# Altium PCB Ad - ESP-12F.PcbDoc
Units mm, origin at the board's own origin, x right, y up, seen from the top; angles counter-clockwise.
Board outline 102 x 50 mm, 2 copper layers (Top Layer, Bottom Layer); 76 components, 58 nets, 277 pads, 56 vias.
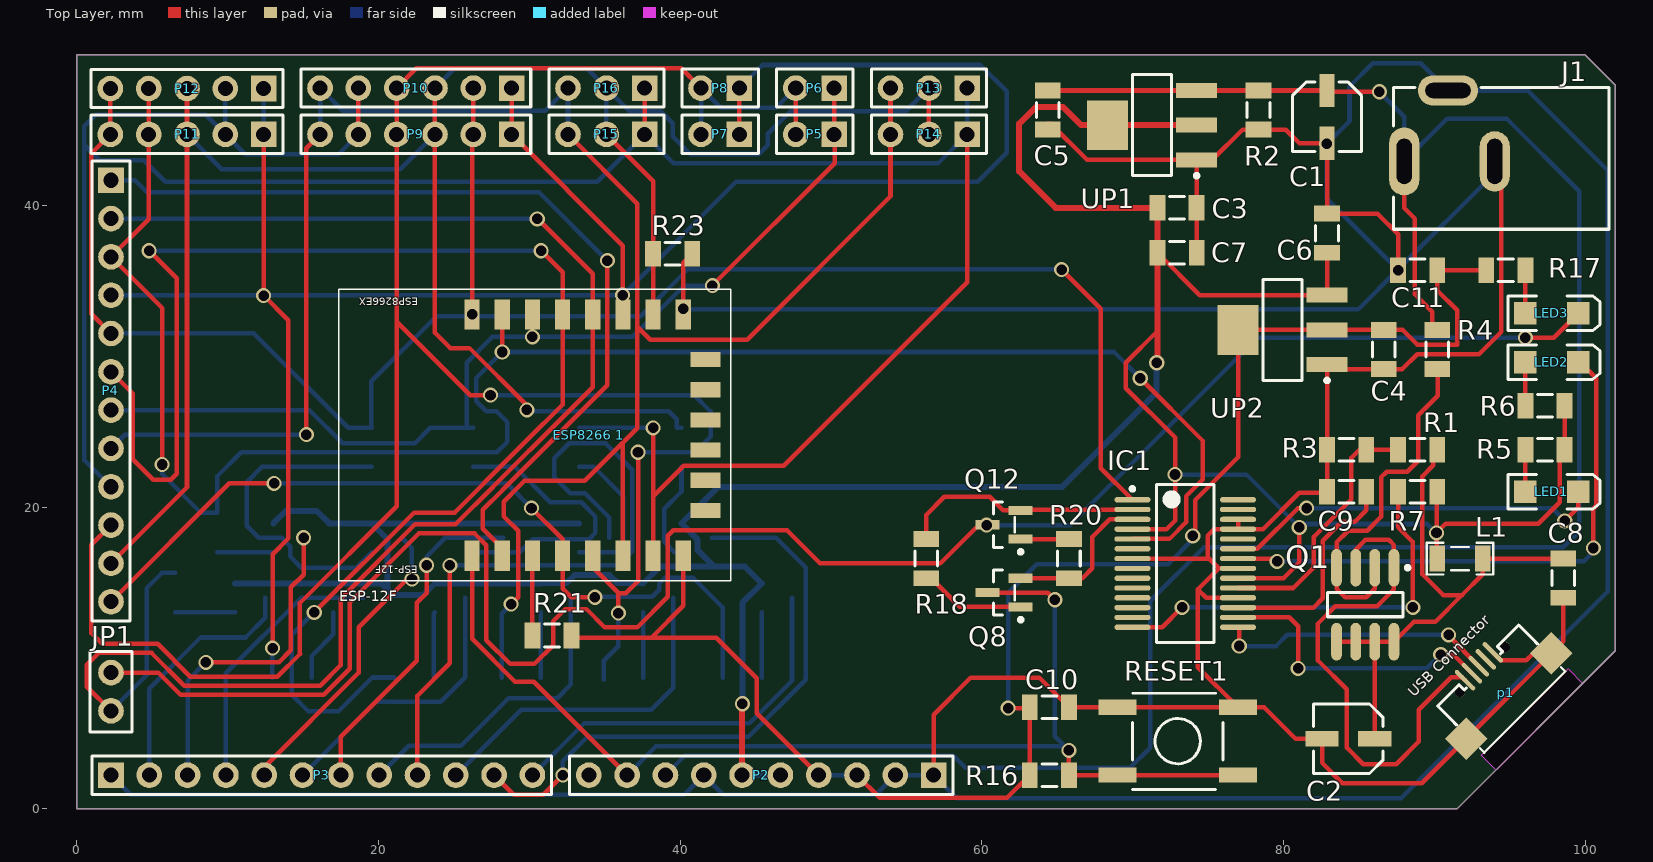
[diagram p0: Top Layer view]
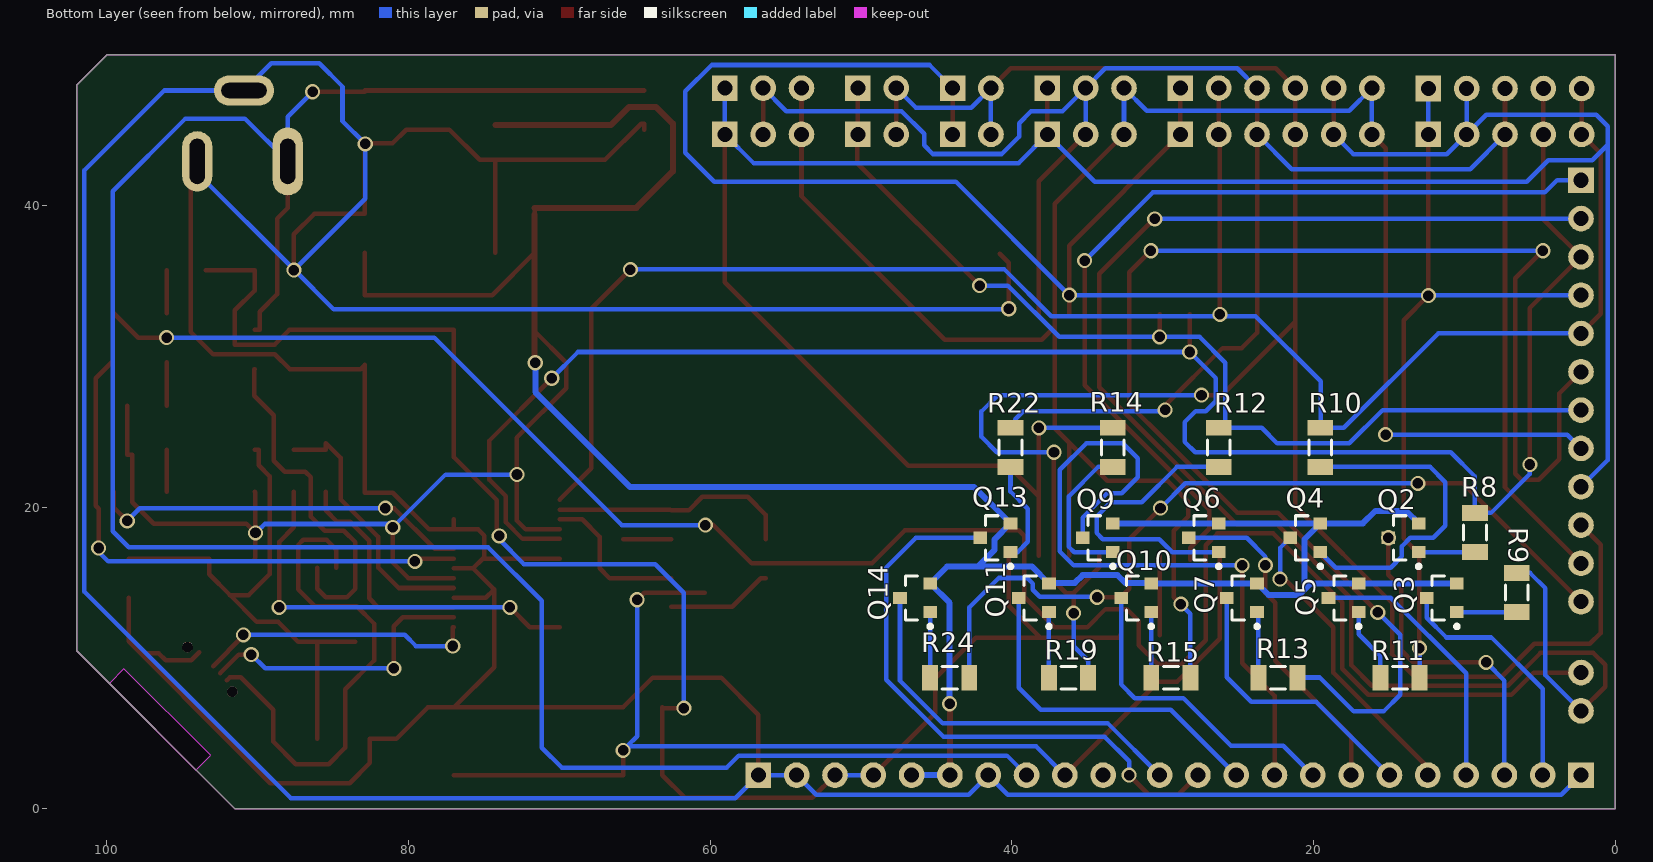
[diagram p1: Bottom Layer view, seen from below]
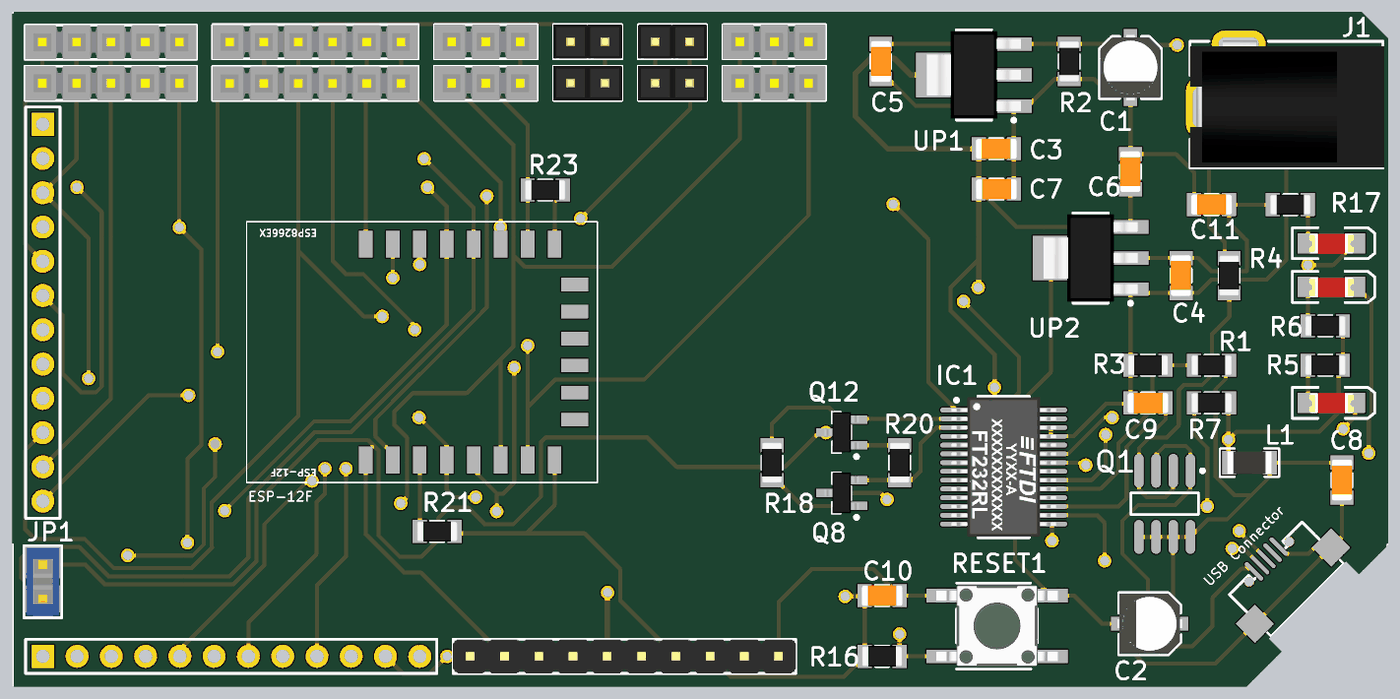
[diagram p2: 3D render of the assembled board from above, using the file's embedded part models]
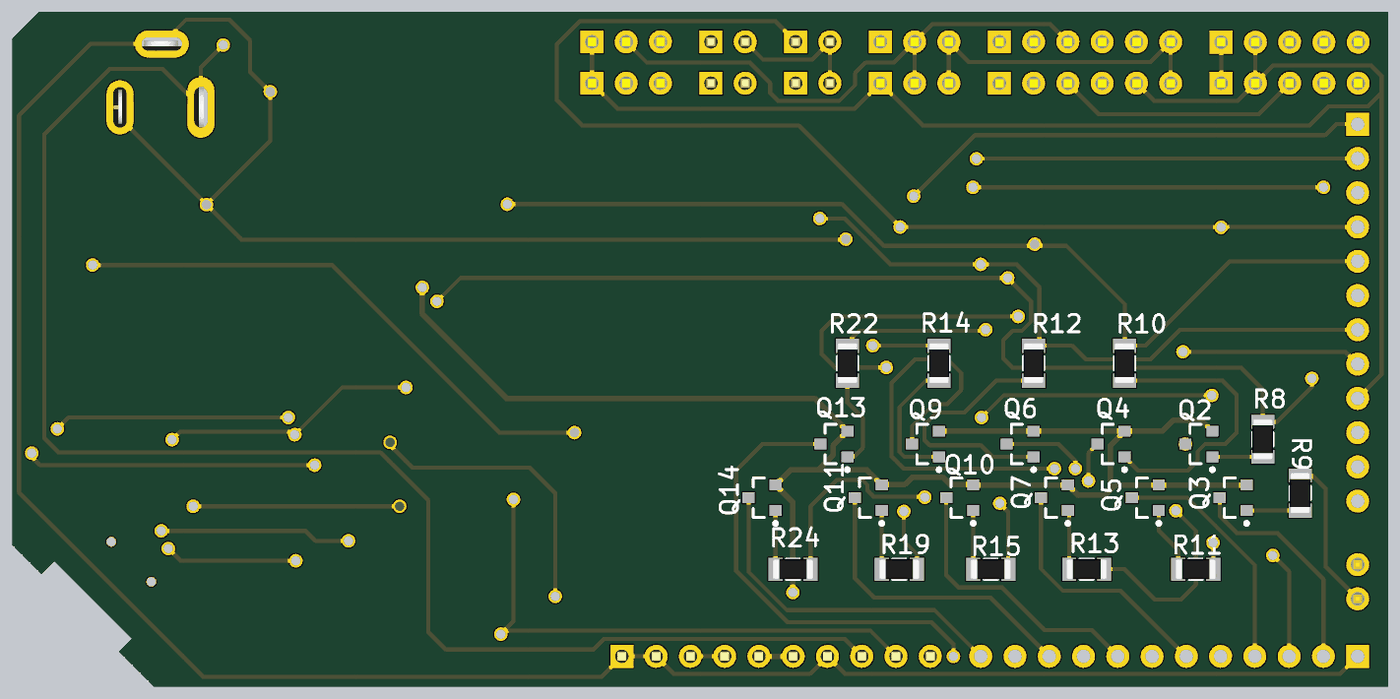
[diagram p3: 3D render of the assembled board from below, using the file's embedded part models]

## Layer stack, top to bottom
Top Solder: solder mask 0.0102, Solder Resist, Dk 3.5
Top Layer: signal copper 0.0356
Dielectric 1: dielectric 0.32, FR-4, Dk 4.8
Bottom Layer: signal copper 0.0356
Bottom Solder: solder mask 0.0102, Solder Resist, Dk 3.5

## Board outline
0,0 0,50 100,50 102,48 102,10.49 91.51,0

## Design rules (kind name [scope] priority, off if disabled: settings)
Clearance [All] p1: gap=0.3 ignorepadtopadclearanceinfootprint=FALSE
ComponentClearance [All] p1: gap=0.3 collisioncheckmode=3 verticalgap=0.3 showdistances=FALSE
Height [All] p1: minheight=0 maxheight=30 prefheight=15
HoleSize [All] p1: absolutevalues=TRUE maxlimit=10 minlimit=0.3 maxpercent=80.000 minpercent=20.000
HoleToHoleClearance [All] p1: gap=0 allowstackedmicrovias=TRUE
MinimumSolderMaskSliver [All] p1: minsoldermaskwidth=0
PlaneClearance [All] p1: clearance=0.5
PlaneConnect [All] p1: planeconnectstyle=Relief reliefexpansion=0.5 reliefentries=4 reliefconductorwidth=0.3 reliefairgap=0.3
PolygonConnect [All] p1: connectstyle=Relief reliefconductorwidth=0.3 reliefentries=4 polygonreliefangle="90 Angle" airgapwidth=0.3
RoutingVias [All] p1: holewidth=0.7 width=1 viastyle="Through Hole" minholewidth=0.7 minwidth=1 maxholewidth=0.7 maxwidth=1
SMDNeckDown [All] p1: percent=100.000
SilkToSilkClearance [All] p1: silktosilkclearance=0
SilkToSolderMaskClearance [IsPad] p1: minsilkscreentomaskgap=0 clearancetoexposedcopper=TRUE
SolderMaskExpansion [All] p1: expansion=0.1
Width [All] p1: maxlimit=0.5 minlimit=0.3 preferedwidth=0.3 minimp=50.000000 maximp=50.000000 favimp=50.000000
21 further rules are at their usual default settings.

## Components (designator, comment, footprint, x,y, rotation, side; value= is the part's Value field where it differs from the comment)
C1 "SMD Capacitors" AECS 82.89,47.63 r270 top value=10uF
C2 "SMD Capacitors" AECS 86.06,4.652 r180 top value=10uF
C3 "100nF" SMD_CAP_1206 71.644,39.866 r0 top
C4 "100nF" SMD_CAP_1206 86.64,31.76 r270 top
C5 "100nF" SMD_CAP_1206 64.38,45.034 r90 top
C6 "100nF" SMD_CAP_1206 82.89,39.466 r270 top
C7 "100nF" SMD_CAP_1206 71.654,36.87 r0 top
C8 "100nF" SMD_CAP_1206 98.56,14 r90 top
C9 "100nF" SMD_CAP_1206 82.89,21.03 r0 top
C10 "100nF" SMD_CAP_1206 63.184,6.74 r0 top
C11 "100nF" SMD_CAP_1206 90.2,35.72 r180 top
"ESP8266 1" "ESP-12F" ESP-12F 41.69,16.788 r90 top
IC1 "FT232RL" SSOP-28_M 73.49,16.271 r0 top
J1 "DC Power Jack" "DC Power Jack 1" 88.01,42.13 r180 top
JP1 "Jumper" "Jumper Small - 2.54 - BLUE" 2.27,7.77 r90 top
L1 "1uH" IND1206 91.71,16.596 r180 top
LED1 "Red" "LED SMD 1206" 97.79,21.03 r0 top
LED2 "Red" "LED SMD 1206" 97.79,29.62 r0 top
LED3 "Red" "LED SMD 1206" 97.79,32.86 r0 top
p1 "USB Connector" USB_AB_BM_SHS 93.95,8.47 r225 top
P2 "POWR" HDR1X10 56.81,2.24 r180 top
P3 "DATA I/O" HDR1X12 2.27,2.24 r0 top
P4 "DATA I/O" HDR1X12 2.27,41.68 r270 top
P5 "IR Remote Control" HDR1X2 50.21,44.72 r180 top
P6 "IR Remote Control" HDR1X2 50.21,47.79 r180 top
P7 "I2C" HDR1X2 43.93,44.72 r180 top
P8 "I2C" HDR1X2 43.93,47.79 r180 top
P9 "I2S" HDR1X6 28.83,44.72 r180 top
P10 "I2S" HDR1X6 28.83,47.79 r180 top
P11 "UART" HDR1X5 12.39,44.72 r180 top
P12 "UART" HDR1X5 12.39,47.76 r180 top
P13 "PWM" HDR1X3 59.03,47.79 r180 top
P14 "PWM" HDR1X3 59.03,44.72 r180 top
P15 "HSPI" HDR1X3 37.65,44.72 r180 top
P16 "HSPI" HDR1X3 37.65,47.79 r180 top
Q1 "IRF7104" SO-8_M 85.425,13.54 r270 top
Q2 "NTR4502PT1G" ONSC-SOT-23-3-318-08_V 14.04,17.976 r0 bottom
Q3 "NTR4502PT1G" ONSC-SOT-23-3-318-08_V 11.5,13.996 r0 bottom
Q4 "NTR4502PT1G" ONSC-SOT-23-3-318-08_V 20.55,17.976 r0 bottom
Q5 "NTR4502PT1G" ONSC-SOT-23-3-318-08_V 18.01,13.996 r0 bottom
Q6 "NTR4502PT1G" ONSC-SOT-23-3-318-08_V 27.29,17.976 r0 bottom
Q7 "NTR4502PT1G" ONSC-SOT-23-3-318-08_V 24.75,13.996 r0 bottom
Q8 "BC547" SOT23_M 61.48,14.342 r180 top
Q9 "NTR4502PT1G" ONSC-SOT-23-3-318-08_V 34.304,17.976 r0 bottom
Q10 "NTR4502PT1G" ONSC-SOT-23-3-318-08_V 31.764,13.996 r0 bottom
Q11 "NTR4502PT1G" ONSC-SOT-23-3-318-08_V 38.544,13.996 r0 bottom
Q12 "BC547" SOT23_M 61.48,18.838 r180 top
Q13 "NTR4502PT1G" ONSC-SOT-23-3-318-08_V 41.094,17.976 r0 bottom
Q14 "NTR4502PT1G" ONSC-SOT-23-3-318-08_V 46.42,13.996 r0 bottom
R1 "4K7" "RES1206 _(3216X08L)" 87.604,23.82 r0 top
R2 "1M" "RES1206 _(3216X08L)" 78.35,45.034 r90 top
R3 "10K" "RES1206 _(3216X08L)" 82.89,23.82 r0 top
R4 "1M" "RES1206 _(3216X08L)" 90.2,29.164 r90 top
R5 "470" "RES1206 _(3216X08L)" 96.04,23.82 r0 top
R6 "470" "RES1206 _(3216X08L)" 96.04,26.73 r0 top
R7 "10K" "RES1206 _(3216X08L)" 90.2,21.03 r180 top
R8 "1M" "RES1206 _(3216X08L)" 9.3,19.622 r270 bottom
R9 "1M" "RES1206 _(3216X08L)" 6.53,13.046 r90 bottom
R10 "1M" "RES1206 _(3216X08L)" 19.55,25.266 r270 bottom
R11 "1M" "RES1206 _(3216X08L)" 12.974,8.696 r0 bottom
R12 "1M" "RES1206 _(3216X08L)" 26.29,25.266 r270 bottom
R13 "1M" "RES1206 _(3216X08L)" 21.06,8.696 r0 bottom
R14 "1M" "RES1206 _(3216X08L)" 33.304,25.266 r270 bottom
R15 "1M" "RES1206 _(3216X08L)" 28.168,8.696 r0 bottom
R16 "1K" "RES1206 _(3216X08L)" 65.78,2.24 r180 top
R17 "100" "RES1206 _(3216X08L)" 96.04,35.72 r180 top
R18 "22K" "RES1206 _(3216X08L)" 56.32,17.892 r270 top
R19 "1M" "RES1206 _(3216X08L)" 34.948,8.696 r0 bottom
R20 "22K" "RES1206 _(3216X08L)" 65.78,17.888 r270 top
R21 "1K" "RES1206 _(3216X08L)" 30.21,11.5 r0 top
R22 "1M" "RES1206 _(3216X08L)" 40.094,25.266 r270 bottom
R23 "100K" "RES1206 _(3216X08L)" 40.806,36.81 r180 top
R24 "1M" "RES1206 _(3216X08L)" 42.824,8.696 r0 bottom
RESET1 "Switch PB" SW-PB 72.998,4.49 r0 top
UP1 "5V" SOT223_M 71.29,45.33 r180 top
UP2 "3V3" SOT223_M 79.94,31.76 r180 top

## Footprints (in the part's own frame and the unit in brackets; to place one, negate y for a bottom-side part, rotate by r counter-clockwise, add the part's x,y. Pads: shape width x height; smd on the part's side, far side on the other; paste and mask are expansions set on the pad)
AECS [mm] "Aluminum Electrolytic Capacitor, Body 4.30x4.30x5.90mm, IPC High Density"
  rect 2.2x1 smd: 1(0,0) 2(3.5,0)
  silkscreen extent -0.55,-2.3 4.05,2.3, body extent -0.65,-2.25 4.15,2.25, height 5.9
"DC Power Jack 1" [mm] "Power Adaptor Jack"
  oval 2x4.5 hole 1 slot 3 at 90 deg: 1(0,-0.8)
  oval 2x4 hole 1 slot 3 at 90 deg: 2(-6,-0.8)
  oval 4x2 hole 1 slot 3 at 0 deg: 3(-2.9,-5.5)
  silkscreen extent -13.59,-5.7 0.7,3.7, body extent -13.68,-5.74 0.72,3.66, height 11.05
ESP-12F [mm] "ESP8266 - ESP-12F WiFi Module"
  rect 2x1 smd: ADC(0,13.48) EN(0,11.48) GND(16,1.48) GPIO0(16,7.48) GPIO1(16,13.48) GPIO2(16,5.48) GPIO3(16,15.48) GPIO4(16,9.48) GPIO5(16,11.48) GPIO12(0,5.48) GPIO13(0,3.48) GPIO14(0,7.48) GPIO15(16,3.48) GPIO16(0,9.48) RST(0,15.48) VCC(0,1.48)
  rect 1x2 smd: ""(3,0) ""(5,0) ""(7,0) ""(9,0) ""(11,0) ""(13.01,0)
  silkscreen extent -1.67,-1.68 17.66,24.31, body extent 0,-0.1 16.1,24, height 2.9
HDR1X2 [mm] "Connector; Header; 2 Position"
  rect 1.7x1.7 hole 1: 1(0,0)
  round 1.7 hole 1: 2(2.54,0)
  silkscreen extent -1.27,-1.27 3.81,1.27, body extent -1.27,-1.28 3.81,1.26, height 8.79
HDR1X3 [mm] "Connector; Header; 3 Position"
  rect 1.7x1.7 hole 1: 1(0,0)
  round 1.7 hole 1: 2(2.54,0) 3(5.08,0)
  silkscreen extent -1.27,-1.27 6.35,1.27, body extent -1.26,-1.27 6.36,1.27, height 8.38
HDR1X5 [mm] "Connector; Header; 5 Position"
  rect 1.7x1.7 hole 1: 1(0,0)
  round 1.7 hole 1: 2(2.54,0) 3(5.08,0) 4(7.62,0) 5(10.16,0)
  silkscreen extent -1.27,-1.27 11.43,1.27, body extent -1.28,-1.27 11.42,1.27, height 8.38
HDR1X6 [mm] "Connector; Header; 6 Position"
  rect 1.7x1.7 hole 1: 1(0,0)
  round 1.7 hole 1: 2(2.54,0) 3(5.08,0) 4(7.62,0) 5(10.16,0) 6(12.7,0)
  silkscreen extent -1.27,-1.27 13.97,1.27, body extent -1.26,-1.25 13.98,1.29, height 8.38
HDR1X10 [mm] "Connector; Header; 10 Position"
  rect 1.7x1.7 hole 1: 1(0,0)
  round 1.7 hole 1: 2(2.54,0) 3(5.08,0) 4(7.62,0) 5(10.16,0) 6(12.7,0) 7(15.24,0) 8(17.78,0) 9(20.32,0) 10(22.86,0)
  silkscreen extent -1.27,-1.27 24.13,1.27, body extent -1.27,-1.24 24.13,1.25, height 8.54
HDR1X12 [mm] "Connector; Header; 12 Position"
  rect 1.7x1.7 hole 1: 1(0,0)
  round 1.7 hole 1: 2(2.54,0) 3(5.08,0) 4(7.62,0) 5(10.16,0) 6(12.7,0) 7(15.24,0) 8(17.78,0) 9(20.32,0) 10(22.86,0) 11(25.4,0) 12(27.94,0)
  silkscreen extent -1.27,-1.27 29.21,1.27
IND1206 [mm] "Chip Inductor, 2-Leads, Body 3/20x1/60mm, IPC Medium Density DESIGNER:ABBAS BASEREH"
  rect 1.04x1.74 smd: 1(-1.51,0) 2(1.51,0)
  silkscreen extent -2.2,-1.05 2.2,1.05, body extent -1.65,-0.85 1.65,0.85, height 0.94
"Jumper Small - 2.54 - BLUE" [mm]
  round 1.7 hole 1: 1(-1.27,0) 2(1.27,0)
  silkscreen extent -2.67,-1.4 2.67,1.4, body extent -2.54,-1.27 2.54,1.27, height 8.57
"LED SMD 1206" [mm]
  rect 1.5x1.5 smd: 1(-1.75,0) 2(1.75,0)
  silkscreen extent -2.9,-1.15 3.2,1.15, body extent -1.65,-0.76 1.65,0.69, height 1.36
ONSC-SOT-23-3-318-08_V [mm] "SOT23, 3-Leads, Body 2.92x1.3mm, Pitch 0.95mm"
  rect 0.9x0.8 smd: 1(-1,0.95) 2(-1,-0.95) 3(1,0)
  silkscreen extent -1.12,-1.46 0.65,2.02, body extent -0.65,-1.46 0.65,1.46, height 1.11
"RES1206 _(3216X08L)" [mm] "Chip Resistor, 2-Leads, Body 3.2x1.6mm, IPC High Density _ (0.125 W)"
  rect 1.05x1.7 smd: 1(0,0) 2(2.596,0)
  silkscreen extent 0.8,-0.75 1.8,0.75, body extent -0.23,-0.76 2.82,0.76, height 0.6
SMD_CAP_1206 [mm]
  rect 1.05x1.7 smd: 1(0,0) 2(2.596,0)
  silkscreen extent 0.8,-0.75 1.8,0.75, body extent -0.22,-0.77 2.82,0.75, height 0.75
SO-8_M [mm] "SOIC, 8-Leads, Body 4.9x3.9mm, Pitch 1.27mm, IPC Low Density"
  oval 2.5x0.7 smd: 1(-2.45,1.905) 2(-2.45,0.635) 3(-2.45,-0.635) 4(-2.45,-1.905) 5(2.45,-1.905) 6(2.45,-0.635) 7(2.45,0.635) 8(2.45,1.905)
  silkscreen extent -2.57,-2.5 0.8,2.93, body extent -2,-2.5 2,2.5, height 1.75
SOT23_M [mm] "SOT23, 3-Leads, Body 2.9x1.3mm, Pitch 0.95mm, Lead Span 2.3mm, IPC Low Density"
  rect 1.6x0.6 smd: 1(-1.1,0.95) 2(-1.1,-0.95) 3(1.1,0)
  silkscreen extent -1.23,-1.5 0.7,1.92, body extent -1.27,-1.5 1.27,1.5, height 1.1
SOT223_M [mm] "SOT223, 4-Leads, Body 6.5x3.5mm, Pitch 2.3mm, Lead Span 7mm, IPC Low Density"
  rect 2.7x1 smd: 1(-2.95,2.3) 2(-2.95,0) 3(-2.95,-2.3)
  rect 2.7x3.3 smd: 4(2.95,0)
  silkscreen extent -3.08,-3.35 1.3,3.47, body extent -3.49,-3.24 3.49,3.24, height 1.64
SSOP-28_M [mm] "SOP, 28-Leads, Body 10.2x5.3mm, Pitch 0.65mm, IPC Low Density"
  oval 2.4x0.35 smd: 1(-3.5,4.225) 2(-3.5,3.575) 3(-3.5,2.925) 4(-3.5,2.275) 5(-3.5,1.625) 6(-3.5,0.975) 7(-3.5,0.325) 8(-3.5,-0.325) 9(-3.5,-0.975) 10(-3.5,-1.625) 11(-3.5,-2.275) 12(-3.5,-2.925) 13(-3.5,-3.575) 14(-3.5,-4.225) 15(3.5,-4.225) 16(3.5,-3.575) 17(3.5,-2.925) 18(3.5,-2.275) 19(3.5,-1.625) 20(3.5,-0.975) 21(3.5,-0.325) 22(3.5,0.325) 23(3.5,0.975) 24(3.5,1.625) 25(3.5,2.275) 26(3.5,2.925) 27(3.5,3.575) 28(3.5,4.225)
  silkscreen extent -3.62,-5.25 1.9,5.25, body extent -3.88,-5.17 3.88,5.16, height 2.16
SW-PB [mm]
  rect 2.5x1 smd: 1(-3.993,2.25) 1(3.992,2.25) 2(-3.993,-2.25) 2(3.992,-2.25)
  silkscreen extent -3,-3.2 3,3.18, body extent -4.5,-3 4.5,3, height 5
USB_AB_BM_SHS [mm] "USB Micro AB - Standard (Bottom mount), Shell SMT DESIGNER ABBAS BASEREH"
  oval 0.3x1.8 smd: 1(1.3,-1.4) 2(0.65,-1.4) 3(0,-1.4) 4(-0.65,-1.4) 5(-1.3,-1.4)
  rect 2x2 smd: 5(-4,1.4) 5(4,1.4)
  round 0.7 hole 0.7: H(-2.1,-1.1) H(2.1,-1.1)
  Keep-Out Layer board cut-out: -4.064,2.9 -4.064,4.291 4.064,4.291 4.064,2.9
  silkscreen extent -3.8,-1.47 3.8,2.9, body extent -4,-1.78 4,4.26, height 2.75

## Part data
C1 C2: Voltage=16V
C3 C4 C5 C6 C7 C8 C9 C10 C11: library part Cap-Bipolar, "Bipolar Capacitor", Voltage=100V, Adding Date=1387/12/20, Designer="Saeid Jorablo", Organazation=ControTec
"ESP8266 1": library part "ESP-12F WiFi Module", "ESP-12F WiFi Module"
IC1: "USB UART Asynchronous Serial Data Transfer Chip, SSOP-28, Tape and Reel", ComponentLink1Description="Manufacturer Link", ComponentLink1URL=http://www.ftdichip.com/Products/ICs/FT232R.htm, ComponentLink2Description=Datasheet, ComponentLink2URL=http://www.ftdichip.com/Support/Documents/DataSheets/ICs/DS_FT232R.pdf, DatasheetVersion="ver 2.07, Jul-2010", PackageDescription="28-Pin Small Outline Package 0.65 mm Pitch", PackageReference=SSOP-28, PackageVersion=2010, Published=19-Aug-2010, Publisher="Altium Limited"
J1: "DC Power Jack. Center Pin 2.5mm. Diameter: 5.7mm", Adding Date=10/21/2009, Company=Personal, Designer="Ali Hafizi", Project Name=Laser
L1: library part "INDUCTOR SMD PACKAGE", "TOTAL INDUCTOR SMD PACK", Data=2017-3-10, Desc.="INDUCTOR  SMD TOTAL PACKAGES", Designer="Abbas Basereh"
LED1 LED2 LED3: library part LED, "LED", Adding Date=1387/12/22, Color=Red, Designer="Saeid Jorablo", Organazation=ControTec, Size="SMD 1206"
  LED3: Type="Builtin LED"
p1: library part "USB MICRO", "USB Connector MICRO-B Type", Max Current=1600mA, Category=Connector, ComponentLink1Description=Datasheet, ComponentLink2Description=Reference, Designer="ABBAS BASEREH", Mounting Technology="Surface Mount\Through-Hole", Pin Count=5-7, Publisher="ABBAS BASEREH", Status=Unreleased, Update=1395-11-17
P2: library part "Header 10", "Header, 10-Pin", LatestRevisionDate=17-Jul-2002, LatestRevisionNote="Re-released for DXP Platform.", Publisher="Altium Limited"
P3 P4: library part "Header 12", "Header, 12-Pin", LatestRevisionDate=17-Jul-2002, LatestRevisionNote="Re-released for DXP Platform.", Publisher="Altium Limited"
P5 P6 P7 P8: library part "Header 2", "Header, 2-Pin", LatestRevisionDate=17-Jul-2002, LatestRevisionNote="Re-released for DXP Platform.", Publisher="Altium Limited"
P9 P10: library part "Header 6", "Header, 6-Pin", LatestRevisionDate=17-Jul-2002, LatestRevisionNote="Re-released for DXP Platform.", Publisher="Altium Limited"
P11 P12: library part "Header 5", "Header, 5-Pin", LatestRevisionDate=17-Jul-2002, LatestRevisionNote="Re-released for DXP Platform.", Publisher="Altium Limited"
P13 P14 P15 P16: library part "Header 3", "Header, 3-Pin", LatestRevisionDate=17-Jul-2002, LatestRevisionNote="Re-released for DXP Platform.", Publisher="Altium Limited"
Q1: "HEXFET Power MOSFET", Code_IPC=SOIC127P600-8, Code_JEDEC=MS-012-AA, ComponentLink1Description="Manufacturer Link", ComponentLink1URL=http://www.irf.com/, ComponentLink2Description=Datasheet, ComponentLink2URL=http://www.irf.com/product-info/datasheets/data/irf7104.pdf, DatasheetVersion=Aug-1997, LatestRevisionDate=13-Apr-2006, LatestRevisionNote="IPC-7351 Footprint Added.", PackageDescription="8-Pin Plastic Small Outline Integrated Circuit 1.27 mm Pitch", PackageReference=SO-8, PackageVersion=Feb-2001, Published=8-Jun-2000, Publisher="Altium Limited"
Q2 Q3 Q4 Q5 Q6 Q7 Q9 Q10 Q11 Q13 Q14: "Power MOSFET, -30 V, -1.95 A, Single, P-Channel, 3-Pin SOT-23, Pb-Free, Tape and Reel", Manufacturer="On Semiconductor", Package Type=SOT-23-3, Supplier Part Number 1=NTR4502PT1GOSTR-ND, Channel Polarity="P Channel", Ciss Typ (pF)=200, ComponentLink1Description="Manufacturer URL", ComponentLink1URL=http://www.onsemi.com/, ComponentLink2Description=Datasheet, ComponentLink2URL=http://www.onsemi.cn/pub_link/Collateral/NTR4502P-D.PDF, ComponentLink3Description="Package Specification", ComponentLink3URL=http://www.onsemi.cn/pub_link/Collateral/318-08.PDF, Configuration=Single, Coss Typ (pF)=80, Crss Typ (pF)=50, DatasheetVersion="Rev. 5", ID Max (A)=1.95, Mounting Technology="Surface Mount", PackageDescription="3-Pin Small Outline Transistor, Body 2.92 x 1.3 mm, Pitch 0.95 mm", PackageReference=SOT-23-3-318-08, PackageVersion="Rev. AP, 11/2009", Packing="Tape and Reel", PartNumber=NTR4502PT1G, RoHS=Pb-Free, Supplier 1=Digi-Key, Supplier 2=Digi-Key, Supplier 3=Digi-Key, Supplier 4=Farnell, Supplier 5=Farnell, Supplier 6=Newark, Supplier 7=Newark, Supplier 8=Mouser, Supplier Part Number 2=NTR4502PT1GOSCT-ND, Supplier Part Number 3=NTR4502PT1GOSDKR-ND, Supplier Part Number 4=1431308, Supplier Part Number 5=1431308RL, Supplier Part Number 6=10N9589, Supplier Part Number 7=98H0966, Supplier Part Number 8=863-NTR4502PT1G, V(BR)DSS Min (V)=30, VGS(th) Max (V)=3, VGS Max (V)=20
Q8 Q12: library part BC337, "45 V, 500 mA NPN general-purpose transistors", ComponentLink1Description="Manufacturer Link", ComponentLink1URL=http://www.nxp.com/, ComponentLink2Description=Datasheet, ComponentLink2URL=http://www.nxp.com/, DatasheetVersion=2017, LatestRevisionDate=2017, LatestRevisionNote="IPC-7351 Footprint Added.", PackageDescription="3-Pin SOT-23 Package 0.95 mm Pitch, 2.3 mm Lead Span", PackageReference=SOT23, PackageVersion=2017-2-8, Published=2017-2-8, Publisher="Abbas Basereh"
R1 R2 R3 R4 R5 R6 R7 R8 R9 R10 R11 R12 R13 R14 R15 R16 R17 R18 R19 R20 R21 R22 R23 R24: library part "RES SMD PACKAGE", "TOTAL SMD RESISTOR PACK", Data=2017-3-10, Desc.="RES SMD PAKAGES", Designer="Abbas Basereh"
RESET1: "Push Button Switch"
UP1 UP2: library part AMS1117-x.x, "x.x Volt, 800mA Low-Dropout Linear Regulator, 4-pin SOT-223", Data=16-12-2016, Designer="Ali Hafizi"
JP1: Company=E.P.I.L, Defualt State=Close, Design Date=2011/11/02

## Via types
v1: diameter 1, hole 0.7, Top Layer to Bottom Layer, 56 vias

## Nets (pads, with @x,y where several pads share a name; then routed paths per layer and width w, separated by ;. In a path a pad name is that pad's centre, name@x,y a point inside that pad or via, vN(x,y) a via of type N, cw(c..) or ccw(c..) an arc to the next point about the centre after c; other vN are vias at no path point)
3V3: "ESP8266 1.VCC" C4.1 C10.1 C11.1 P2.3 P2.4 R16.2 R17.2 R21.2 UP2.2 UP2.4 | length 109.3
  Top Layer w0.3: R21.2 32.806,11.353 38.101,11.353 ; 40.21,16.788 40.21,13.462 38.101,11.353 ; P2.4 45.08,6.35 45.08,8.67 42.397,11.353 38.101,11.353 ; P2.3 53.24,0.73 61.674,0.73 R16.2 C10.1@63.184,6.68 ; v1(61.747,6.68) C10.1@63.184,6.68 ; C10.1 C10.1@63.184,6.68 ; v1(73.99,18.1) 74.143,18.253 74.143,20.472 76.99,23.32 UP2.4 UP2.2 C4.1 87.899,31.76 88.875,30.785 91.516,30.785 91.516,33.05 90.2,34.366 C11.1 R17.2
  Bottom Layer w0.3: P2.4 P2.3 ; v1(61.747,6.68) 61.747,14.326 63.652,16.231 72.351,16.231 73.99,17.87 v1(73.99,18.1)
5IO0: P3.2 Q3.3 | length 16.7
  Bottom Layer w0.3: P3.2 4.81,7.964 8.21,11.364 11.192,11.364 12.5,12.672 Q3.3
5IO1: P3.3 Q2.3 | length 21.8
  Top Layer w0.3: v1(8.56,9.72) 8.57,9.71 13.384,9.71 14.198,10.524 14.198,14.688 15.04,15.53 v1(15.04,17.976)
  Bottom Layer w0.3: P3.3 7.35,8.51 v1(8.56,9.72)
5IO2: P3.4 Q5.3 | length 17.9
  Bottom Layer w0.3: P3.4 9.89,8.989 14.897,13.996 Q5.3
5IO3: P3.5 Q4.3 | length 20.3
  Top Layer w0.3: P3.5 12.43,2.768 18.703,9.041 18.703,12.035 21.907,15.24 v1(22.225,15.24)
  Bottom Layer w0.3: Q4.3 22.225,17.301 v1(22.225,15.24)
5IO4: P3.6 Q7.3 | length 18.7
  Bottom Layer w0.3: P3.6 19.836,7.106 24.13,7.106 25.75,8.726 Q7.3
5IO5: P3.7 Q6.3 | length 22.5
  Top Layer w0.3: P3.7 17.51,4.785 22.545,9.819 22.545,13.66 23.19,14.305 v1(23.19,16.154)
  Bottom Layer w0.3: v1(23.19,16.154) 23.19,16.726 24.44,17.976 Q6.3
5IO12: P3.8 Q10.3 | length 20.9
  Bottom Layer w0.3: P3.8 22.001,4.191 25.476,4.191 28.626,7.341 31.85,7.341 32.764,8.255 Q10.3
5IO13: P3.9 Q9.3 | length 46.6
  Top Layer w0.3: P3.9 22.59,7.502 24.74,9.652 v1(24.74,16.15)
  Bottom Layer w0.3: v1(24.74,16.15) v1@24.74,16.154 ; v1@24.74,16.358 v1@24.74,16.154 ; Q9.3 35.304,19.316 33.696,20.925 32.715,20.925 31.66,21.98 31.66,23.253 32.657,24.25 35.059,24.25 36.83,22.479 36.83,17.07 35.914,16.154 v1@24.74,16.154
5IO14: P3.10 Q11.3 | length 22.8
  Bottom Layer w0.3: P3.10 29.469,6.579 38.1,6.579 39.544,8.023 Q11.3
5IO15: P3.11 Q13.3 | length 39.4
  Top Layer w0.3: P3.11 28.97,0.94 30.937,0.94 v1(32.233,2.235)
  Bottom Layer w0.3: v1(32.233,2.235) 32.233,3.15 33.858,4.775 44.537,4.775 48.336,8.575 48.336,16.002 46.362,17.976 Q13.3
5IO16: P3.12 Q14.3 | length 25.3
  Bottom Layer w0.3: P3.12 33.634,5.664 44.577,5.664 47.42,8.507 Q14.3
5V: C3.1 C6.2 C7.1 IC1.4 IC1.20 L1.2 P2.5 P2.6 Q2.2 Q3.2 Q4.2 Q5.2 Q6.2 Q7.2 Q9.2 Q10.2 Q11.2 Q13.2 Q14.2 R5.2 R6.2 R7.1 UP1.2 UP1.4 UP2.3 | length 235.2
  Top Layer w0.3: v1@44.11,6.95 v1(44.13,6.97) ; IC1.4 72.244,18.546 72.82,19.122 72.82,24.62 69.545,27.895 69.545,29.575 71.654,31.684 ; v1(71.6,29.58) 71.618,29.58 v1@71.654,29.616 ; C3.1 71.644,39.853 71.644,39.403 C3.1@71.654,39.403 ; C7.1 74.464,34.06 UP2.3 C6.2 ; IC1.20 80.01,15.296 81.051,16.337 v1(81.051,18.669) ; L1.2 90.15,16.646 v1(90.15,18.3) ; R7.1 90.15,20.98 v1(90.15,18.3) ; R6.2 R5.2 98.636,23.495 98.323,23.495 98.323,20.32 96.901,18.898 90.748,18.898 v1(90.15,18.3)
  Top Layer w0.4: P2.6 v1@44.11,6.95 ; C3.1@71.644,39.853 64.897,39.853 62.48,42.27 62.48,45.43 63.6,46.55 65.37,46.55 66.59,45.33 UP1.4 UP1.2 ; v1@71.654,29.616 71.654,31.684 C7.1 C3.1@71.654,39.403
  Bottom Layer w0.3: Q2.2@13,18.95 12.98,18.93 12.984,18.926 Q2.2 ; Q4.2@19.544,18.926 Q4.2 ; 22.981,14.183 22.984,14.18 ; Q10.2 Q10.2@30.799,14.981 ; Q11.2@37.509,14.981 Q11.2 ; v1(72.81,22.17) 77.55,22.17 v1@80.831,18.889 ; v1(81.051,18.669) v1@80.831,18.889 ; v1(90.15,18.3) 89.77,18.68 89.75,18.68 89.541,18.889 v1@80.831,18.889
  Bottom Layer w0.4: Q3.2 Q5.2 20.192,14.946 20.6,14.538 ; Q2.2 13.864,19.75 15.91,19.75 16.734,18.926 19.544,18.926 20.6,17.87 20.6,14.538 ; Q4.2 Q6.2 Q9.2 ; 22.981,14.183 20.955,14.183 20.6,14.538 ; 22.984,14.18 Q7.2 Q10.2 ; Q10.2@30.799,14.981 32.477,14.981 33,15.504 35.308,15.504 35.832,14.981 Q11.2@37.509,14.981 ; Q11.2 38.658,16.06 42.26,16.06 ; P2.6 P2.5 ; v1(44.13,6.97) 44.13,13.656 Q14.2 44.306,16.06 42.26,16.06 ; v1(71.6,29.58) 71.6,27.633 65.303,21.336 42.504,21.336 Q13.2 41.144,17.876 41.144,17.176 42.26,16.06
ADC: "ESP8266 1.ADC" P4.1 | length 58.9
  Top Layer w0.3: 28.17,16.52 28.17,17.313 26.92,18.563 26.92,19.823 28.21,21.113 28.21,21.124 30.26,23.174 30.271,23.174 34.81,27.713 34.81,27.724 35.17,28.084 35.17,36.338 v1(35.179,36.347)
  Bottom Layer w0.3: P4.1 3.861,41.68 4.672,40.869 30.658,40.869 v1(35.179,36.347)
DTR: IC1.2 Q12.2 R18.1 | length 16.2
  Top Layer w0.3: R18.1 56.32,19.49 57.516,20.686 60.538,20.686 61.436,19.788 Q12.2 62.638,19.846 IC1.2
EN: "ESP8266 1.EN" R21.1 | length 5.3
  Top Layer w0.3: R21.1 30.21,16.788
GND: "ESP8266 1.GND" C1.2 C2.2 C3.2 C4.2 C5.1 C6.1 C7.2 C8.1 C9.1 C10.2 C11.2 IC1.7 IC1.18 IC1.21 IC1.25 IC1.26 J1.2 J1.3 p1.5 P2.1 P2.2 P2.7 P3.1 R2.1 R3.1 R23.1 RESET1.1 UP1.1 UP2.1 | length 401.4
  Top Layer w0.3: v1@40.21,32.788 40.21,36.214 R23.1 ; v1(40.21,33.16) v1@40.21,33.619 ; P2.1 56.81,6.25 59.27,8.71 63.81,8.71 C10.2 69.005,6.74 RESET1.1@76.99,6.74 ; C5.1 64.38,45.425 64.583,45.425 66.977,43.03 UP1.1 ; IC1.7 75.075,16.596 ; C7.2 74.24,36.88 C3.2 UP1.1 ; 74.44,14.66 74.33,14.55 ; 74.44,14.661 75.725,15.946 ; IC1.18 74.884,13.996 74.33,14.55 ; IC1.21 75.725,15.946 ; IC1.26 IC1.25 ; C1.2@82.87,44.13 81.066,44.13 80.162,45.034 R2.1 77.29,45.034 75.286,43.03 UP1.1 ; C1.2@82.89,44.09 C6.1 86.238,39.466 87.604,38.1 v1(87.604,35.72) ; p1.5@93.879,10.379 94.41,9.849 96.109,9.849 96.568,10.308 p1.5@97.768,10.308 ; J1.2@94.01,43.713 J1.2 94.35,42.93 94.437,42.843 94.437,31.623 92.964,30.15 88.875,30.15 87.889,29.164 C4.2 83.186,29.164 UP2.1 R3.1 C9.1 82.89,20.955 81.051,20.955 78.642,18.546 IC1.25 ; C8.1 98.56,11.1 p1.5@97.768,10.308 ; 74.33,14.55 74.33,9.4 RESET1.1@76.99,6.74 ; 75.075,16.596 74.97,16.701 74.97,18.12 75.396,18.546 IC1.25 ; 75.075,16.596 75.725,15.946 ; RESET1.1@76.99,6.74 78.715,6.74 80.803,4.652 C2.2 82.56,3.05 83.91,1.7 89.16,1.7 92.112,4.652 p1.5@97.768,10.308
  Bottom Layer w0.3: P3.1 3.57,0.94 40.27,0.94 P2.7 42.87,0.94 52.97,0.94 P2.2 P2.1 58.34,0.71 87.8,0.71 101.5,14.41 101.5,42.33 96.2,47.63 J1.3 89.11,49.43 85.92,49.43 84.38,47.89 84.38,45.6 v1(82.87,44.09) 82.87,40.454 v1@87.587,35.737 ; v1(40.21,33.16) 40.259,33.111 84.961,33.111 v1@87.587,35.737 ; v1(87.604,35.72) v1@87.587,35.737 ; J1.2 94.01,42.16 v1@87.587,35.737
IO0: "ESP8266 1.GPIO0" JP1.1 P4.2 R9.2 | length 101.7
  Top Layer w0.3: JP1.1 0.67,8.1 0.67,9.547 1.463,10.34 4.961,10.34 7.131,8.17 16.135,8.17 17.503,9.538 17.503,13.937 22.429,18.863 25.111,18.863 27.61,21.362 27.61,21.373 30.012,23.774 30.023,23.774 34.21,27.962 34.21,32.788 34.21,35.484 30.574,39.12 v1(30.53,39.12)
  Bottom Layer w0.3: JP1.1 4.63,8.86 4.63,14.621 5.651,15.642 R9.2 ; P4.2 30.554,39.14 30.534,39.12 v1(30.53,39.12)
IO1: "ESP8266 1.GPIO1" IC1.5 P4.3 P11.4 P12.4 R8.1 | length 124.5
  Top Layer w0.3: P12.4 P11.4 4.77,39.1 P4.3 5.664,33.206 v1(5.664,22.835) ; v1(28.21,30.293) 28.21,32.788 ; IC1.5 72.442,17.896 73.543,18.996 73.543,20.721 74.64,21.818 74.64,24.42 v1(70.51,28.55)
  Bottom Layer w0.3: v1(5.664,22.835) 5.664,22.2 8.242,19.622 R8.1 9.3,22.04 10.905,23.645 27.855,23.645 28.54,24.33 28.54,25.65 27.825,26.365 27.155,26.365 26.482,27.038 26.482,28.565 v1(28.21,30.293) 68.767,30.293 v1(70.51,28.55)
IO2: "ESP8266 1.GPIO2" P4.4 P7.1 P8.1 P9.1 P10.1 P11.1 P12.1 R11.1 | length 147.8
  Top Layer w0.3: P11.1 v1(12.39,34.036) 14.03,32.396 14.03,17.93 12.99,16.89 v1(12.99,10.66) ; P10.1 P9.1 36.21,37.34 36.21,32.788 ; P7.1 P8.1
  Bottom Layer w0.3: P4.4 v1@12.366,34.06 ; v1(12.39,34.036) v1@12.366,34.06 ; P11.1 P12.1 ; R11.1 12.974,10.644 v1(12.99,10.66) ; P8.1 45.46,49.32 59.9,49.32 61.65,47.57 61.65,43.5 59.73,41.58 43.71,41.58 v1(36.19,34.06) v1@12.366,34.06
IO3: "ESP8266 1.GPIO3" IC1.1 P4.5 P9.2 P10.2 P11.5 P12.5 R10.1 | length 121.3
  Top Layer w0.3: P12.5 P11.5 0.965,43.455 0.965,32.825 P4.5 ; v1(26.21,32.788) 26.21,44.64 P9.2 P10.2 ; v1(65.3,35.75) 67.9,33.15 67.9,22.586 IC1.1
  Bottom Layer w0.3: P4.5 11.736,31.52 17.99,25.266 R10.1@19.533,25.266 ; R10.1 R10.1@19.533,25.266 ; v1@65.3,35.763 40.495,35.763 37.396,32.664 23.851,32.664 19.533,28.346 R10.1@19.533,25.266
IO4: "ESP8266 1.GPIO4" P4.6 R13.1 | length 98.8
  Top Layer w0.3: P4.6 3.708,27.542 3.708,23.19 5.08,21.819 6.223,21.819 6.629,22.225 6.629,35.179 v1(4.801,37.008) ; v1(15.748,13.03) 22.368,19.65 25.05,19.65 27.01,21.61 27.01,21.621 29.763,24.374 29.774,24.374 32.21,26.81 32.21,32.788 32.21,35.585 v1(30.788,37.008)
  Bottom Layer w0.3: v1(4.801,37.008) v1(30.788,37.008) ; v1(15.748,13.03) 14.26,11.542 14.26,7.56 15.36,6.46 17.33,6.46 19.582,8.712 21.06,8.712 R13.1
IO5: "ESP8266 1.GPIO5" P4.7 P5.1 P6.1 R12.1 | length 66
  Top Layer w0.3: v1(30.21,31.293) 30.21,32.788 ; v1(42.139,34.696) 50.249,42.807 50.249,44.681 P5.1 P6.1
  Bottom Layer w0.3: P4.7 15.43,26.44 17.625,24.245 22.423,24.245 23.444,25.266 R12.1@25.857,25.266 ; R12.1 R12.1@25.857,25.266 ; v1(42.139,34.696) 40.276,34.696 36.873,31.293 v1(30.21,31.293) 27.563,31.293 25.857,29.587 R12.1@25.857,25.266
IO12: "ESP8266 1.GPIO12" P4.8 P9.6 P10.6 P13.3 P14.3 P15.3 P16.3 R15.1 | length 138
  Top Layer w0.3: v1(15.22,24.81) 15.22,43.81 P9.6 ; v1(28.8,13.58) 29.26,14.04 29.26,18.449 28.32,19.389 28.32,20.375 28.81,20.865 28.81,20.875 29.685,21.75 33.678,21.75 36.21,24.282 ; P15.3 37.16,40.13 37.16,31.97 ; 36.21,16.788 36.21,24.282 ; P13.3 P14.3 53.95,40.615 44.45,31.115 38.015,31.115 37.16,31.97 ; 36.21,24.282 37.16,25.232 37.16,31.97
  Bottom Layer w0.3: P4.8 3.18,24.81 v1(15.22,24.81) ; P9.6 P10.6 17.641,46.279 31.059,46.279 P16.3 P15.3 ; R15.1 28.168,12.948 v1(28.8,13.58)
IO13: "ESP8266 1.GPIO13" P4.9 P9.5 P10.5 P11.2 P12.2 P13.1 P14.1 P15.1 P16.1 R14.1 | length 169.3
  Top Layer w0.3: P9.5 P10.5 ; P15.1 P16.1 ; 38.21,16.788 38.21,20.735 ; v1(38.21,25.266) 38.21,20.735 ; P14.1 59.03,34.925 46.863,22.758 40.234,22.758 38.21,20.735
  Bottom Layer w0.3: P4.9 0.5,23.13 0.5,44.03 ; P12.2 P11.2 ; P9.5 17.359,43.409 11.161,43.409 P11.2 ; R14.1 v1(38.21,25.266) ; P13.1 P14.1 57.13,42.82 39.55,42.82 P15.1 34.51,41.58 5.867,41.58 4.445,43.002 1.528,43.002 0.5,44.03 ; 0.5,44.03 0.5,45.255 1.27,46.025 8.545,46.025 P11.2
IO14: "ESP8266 1.GPIO14" P4.10 P5.2 P6.2 P7.2 P8.2 P9.4 P10.4 R19.1 | length 148.1
  Top Layer w0.3: P4.10 0.965,17.515 0.965,11.659 1.684,10.94 5.36,10.94 7.53,8.77 13.3,8.77 14.798,10.268 ; 14.81,10.28 14.798,10.268 ; v1(27.432,27.432) 26.081,27.432 21.21,32.303 ; 34.21,16.788 34.21,16.031 35.91,14.331 ; v1(35.91,12.98) 35.91,14.331 ; v1(37.211,23.647) 37.211,15.101 36.4,14.29 35.951,14.29 35.91,14.331 ; P8.2 40.082,49.098 22.518,49.098 P10.4 P9.4 21.21,32.303 ; P5.2 P6.2 P6.2@47.709,47.751 ; 14.798,10.268 14.798,13.652 21.21,20.065 21.21,32.303
  Bottom Layer w0.3: v1(27.432,27.432) 40.938,27.432 42.02,26.35 42.02,24.67 40.997,23.647 v1(37.211,23.647) ; R19.1@34.94,8.58 34.94,9.822 35.91,10.792 v1(35.91,12.98) ; P7.2 P8.2 42.698,46.482 46.362,46.482 P6.2
IO15: "ESP8266 1.GPIO15" P4.11 P9.3 P10.3 P11.3 P12.3 P13.2 P14.2 P15.2 P16.2 R22.1 R23.2 | length 145.4
  Top Layer w0.3: P4.11 7.31,21.32 P11.3 P12.3 ; P10.3 P9.3 23.75,31.567 24.761,30.555 26.036,30.555 29.84,26.751 v1(29.84,26.45) ; P15.2 38.21,41.62 R23.2 38.21,32.788 ; P14.2 P13.2
  Bottom Layer w0.3: P11.3 9.612,42.418 21.448,42.418 P9.3 ; P10.3 25.058,49.098 33.802,49.098 P16.2 ; v1(29.84,26.45) 29.925,26.365 39.243,26.365 39.776,25.832 39.776,25.266 R22.1 ; P15.2 P16.2 ; P13.2 54.953,46.253 47.32,46.253 45.822,44.755 45.822,44.004 45.237,43.42 40.679,43.42 39.522,44.577 39.522,45.466 38.735,46.253 36.647,46.253 P16.2
IO16: "ESP8266 1.GPIO16" P4.12 R24.1 | length 55.1
  Top Layer w0.3: P4.12 10.11,21.58 v1(13.08,21.58) ; v1(30.15,19.939) 32.21,17.879 32.21,16.788 32.21,14.605 32.784,14.031 v1(34.356,14.031)
  Bottom Layer w0.3: v1(13.08,21.58) 28.509,21.58 v1(30.15,19.939) ; v1(34.356,14.031) 34.397,14.072 38.156,14.072 38.61,14.526 38.61,14.94 38.98,15.31 40.87,15.31 42.824,13.356 R24.1
NetC9_2: C9.2 IC1.17 | length 14.6
  Top Layer w0.3: IC1.17 81.991,13.346 82.601,13.956 82.601,17.78 83.869,19.047 84.741,19.047 85.486,19.793 C9.2
NetIC1_14: IC1.14 R7.2 | length 27.2
  Top Layer w0.3: IC1.14 71.965,12.046 v1(73.279,13.36) ; R7.2 87.604,18.676 88.582,17.697 v1(88.582,13.36)
  Bottom Layer w0.3: v1(73.279,13.36) v1(88.582,13.36)
NetIC1_15: IC1.15 p1.3 | length 18.4
  Top Layer w0.3: IC1.15 77.064,12.046 77.07,12.04 v1(77.07,10.8) ; v1(90.951,11.54) 90.951,11.469 p1.3
  Bottom Layer w0.3: v1(77.07,10.8) 79.51,10.8 80.25,11.54 v1(90.951,11.54)
NetIC1_16: IC1.16 p1.2 | length 19.4
  Top Layer w0.3: IC1.16 80.391,12.696 80.975,12.112 v1(80.975,9.322) ; v1(90.43,10.23) 91.271,10.23 p1.2
  Bottom Layer w0.3: v1(80.975,9.322) 89.51,9.322 90.418,10.23 v1(90.43,10.23)
NetIC1_22: IC1.22 LED2.2 | length 37.1
  Top Layer w0.3: IC1.22 79.397,16.596 v1(79.585,16.408) ; LED2.2@99.619,29.67 100.74,28.549 100.74,20.094 100.55,19.903 v1(100.55,17.3)
  Bottom Layer w0.3: v1(79.585,16.408) 99.924,16.408 100.55,17.035 v1(100.55,17.3)
NetIC1_23: IC1.23 LED1.2 | length 25.4
  Top Layer w0.3: IC1.23 78.272,17.246 80.965,19.939 v1(81.534,19.939) ; v1(98.654,19.101) 99.54,19.987 LED1.2
  Bottom Layer w0.3: v1(81.534,19.939) 97.815,19.939 v1(98.654,19.101)
NetJP1_2: JP1.2 LED3.2 Q12.3 | length 128.2
  Top Layer w0.3: JP1.2 5.413,9.04 6.883,7.57 16.384,7.57 18.103,9.289 18.103,13.688 22.677,18.263 26.372,18.263 27.16,17.474 27.16,11.18 28.73,9.61 30.331,9.61 31.58,10.859 31.58,12.454 32.376,13.25 33.793,13.25 35.013,12.03 37.16,12.03 39.192,14.062 39.192,18.11 39.548,18.466 47.092,18.466 49.276,16.281 57.26,16.281 59.817,18.838 Q12.3@60.32,18.838 ; v1(60.32,18.82) Q12.3@60.32,18.838 ; Q12.3@60.32,19.004 Q12.3@60.32,18.838 ; Q12.3 Q12.3@60.32,18.838 ; v1(96.037,31.242) 97.922,31.242 LED3.2
  Bottom Layer w0.3: v1(60.32,18.82) 65.861,18.82 78.283,31.242 v1(96.037,31.242)
NetLED1_1: LED1.1 R5.1 | length 2.8
  Top Layer w0.3: LED1.1 R5.1
NetLED2_1: LED2.1 R6.1 | length 2.9
  Top Layer w0.3: R6.1 LED2.1
NetLED3_1: LED3.1 R17.1 | length 2.9
  Top Layer w0.3: LED3.1 R17.1
Netp1_1: p1.1 Q1.1 Q1.3 | length 34.1
  Top Layer w0.3: Q1.3 84.79,17.19 85.44,17.84 86.986,17.84 87.33,17.496 Q1.1 87.33,14.565 86.205,13.44 83.442,13.44 82.29,12.288 82.29,9.84 84.19,7.94 84.19,4.07 85.29,2.97 87.47,2.97 88.97,4.47 88.97,6.575 91.135,8.74 91.842,8.74 p1.1
NetQ1_2: Q1.2 Q1.4 R4.1 | length 23.3
  Top Layer w0.3: Q1.2 86.06,14.605 85.495,14.04 84.085,14.04 83.52,14.605 Q1.4 83.52,17.678 84.289,18.447 85.549,18.447 86.47,19.368 86.47,21.979 86.851,22.36 88.21,22.36 88.93,23.08 88.93,26.09 90.221,27.381 90.221,29.164 R4.1
NetQ2_1: Q2.1 R8.2 | length 3.7
  Bottom Layer w0.3: R8.2 Q2.1
NetQ3_1: Q3.1 R9.1 | length 4
  Bottom Layer w0.3: R9.1 Q3.1
NetQ4_1: Q4.1 R10.2 | length 21.8
  Bottom Layer w0.3: Q4.1 18.524,16 14.89,16 14.14,16.75 14.14,17.412 13.582,17.97 12.07,17.97 11.26,18.78 11.26,21.66 12.27,22.67 R10.2
NetQ5_1: Q5.1 R11.2 | length 4.9
  Bottom Layer w0.3: R11.2 15.57,10.135 17.01,11.575 Q5.1
NetQ6_1: Q6.1 R12.2 | length 19.2
  Bottom Layer w0.3: Q6.1 29.37,17.026 30.226,17.882 33.972,17.882 34.392,18.301 34.392,19.38 33.447,20.325 31.404,20.325 29.059,22.67 R12.2
NetQ7_1: Q7.1 R13.2 | length 4.4
  Bottom Layer w0.3: R13.2 23.656,12.952 Q7.1
NetQ8_1: Q8.1 R18.2 | length 7
  Top Layer w0.3: R18.2 56.642,15.296 58.546,13.392 Q8.1
NetQ9_1: Q9.1 R14.2 | length 10.1
  Bottom Layer w0.3: Q9.1 35.877,17.026 36.22,17.369 36.22,20.74 34.29,22.67 R14.2
NetQ10_1: Q10.1 R15.2 | length 4.4
  Bottom Layer w0.3: R15.2 Q10.1
NetQ11_1: Q11.1 R19.2 | length 4.4
  Bottom Layer w0.3: R19.2 Q11.1
NetQ12_1: Q12.1 R20.1 | length 3.2
  Top Layer w0.3: Q12.1 R20.1
NetQ13_1: Q13.1 R22.2 | length 6.9
  Bottom Layer w0.3: Q13.1 39.629,17.026 38.95,17.705 38.95,19.9 40.094,21.044 R22.2
NetQ14_1: Q14.1 R24.2 | length 4.4
  Bottom Layer w0.3: R24.2 45.42,10.846 Q14.1
RESET: IC1.19 R1.1 R3.2 | length 17.8
  Top Layer w0.3: IC1.19 80.645,14.646 82.001,16.002 82.001,18.029 84.511,20.538 84.511,23.281 85.486,24.256 R3.2 ; R3.2@85.52,23.82 R1.1
RST: "ESP8266 1.RST" P2.9 Q8.3 R16.1 RESET1.2 | length 77.2
  Top Layer w0.3: 26.21,16.788 26.21,11.281 29.051,8.441 30.289,8.441 P2.9 ; Q8.3 64.373,14.342 v1(64.846,13.868) ; v1(65.78,3.886) R16.1 69.005,2.24 RESET1.2@76.99,2.24
  Bottom Layer w0.3: P2.9 38.39,4.14 v1@65.526,4.14 ; v1(64.846,13.868) 64.846,4.82 v1@65.526,4.14 ; v1(65.78,3.886) v1@65.526,4.14
RTS: IC1.3 Q8.2 R20.2 | length 10.2
  Top Layer w0.3: Q8.2 R20.2 66.675,15.292 67.33,15.947 67.33,18.029 68.497,19.196 IC1.3
USB: C2.1 C8.2 L1.1 Q1.5 Q1.6 Q1.7 Q1.8 R1.2 | length 36.4
  Top Layer w0.3: Q1.5 Q1.6 Q1.7 ; C2.1 Q1.7 ; R1.2 89.94,23.82 89.94,22.781 89.2,22.041 89.2,15.57 90.591,14.179 91.841,14.179 ; C8.2 L1.1 93.22,15.557 91.841,14.179 ; Q1.7 Q1.8 88.635,12.395 90.058,12.395 91.841,14.179
Vin: C1.1 C5.2 J1.1 P2.8 R2.2 R4.2 UP1.3 | length 148.5
  Top Layer w0.3: C5.2 UP1.3 R2.2 C1.1 82.89,47.549 v1(86.36,47.549) ; J1.1 88.01,39.84 88.722,39.128 88.722,34.112 89.865,32.969 89.865,31.76 R4.2
  Bottom Layer w0.3: P2.8 40.33,3.54 58.115,3.54 58.912,2.743 69.85,2.743 71.171,4.064 71.171,13.8 74.73,17.358 79.979,17.358 79.989,17.348 98.552,17.348 99.619,18.415 99.619,40.945 94.793,45.771 90.851,45.771 J1.1 ; v1(86.36,47.549) 88.01,45.899 J1.1@88.01,45.06
pads on no net: "ESP8266 1." IC1.6 IC1.8 IC1.9 IC1.10 IC1.11 IC1.12 IC1.13 IC1.24 IC1.27 IC1.28 p1.4 p1.H P2.10

## Keep-outs
Keep-Out Layer:
  the board outline again, w0.1

## Dimensions
102,10.49 to 0,0 on Top Overlay
0,0 to 0,50 on Top Overlay

## Text inside footprints (layer, text, board x,y; h text height)
"ESP8266 1": Top Overlay "ESP8266EX" at 22.65,33.878 h0.5 r180
p1: Mechanical 1 "PCB EDGE" at 97.882,7.95 h0.7 r225